# Altium PCB CartReader_1.2_Minimal.PcbDoc
Units mm, origin at the board's own origin, x right, y up, seen from the top; angles counter-clockwise.
Board outline 100 x 50 mm, 2 copper layers (Top Layer, Bottom Layer), stack 1.62 mm thick; 61 components, 75 nets, 314 pads, 273 vias.
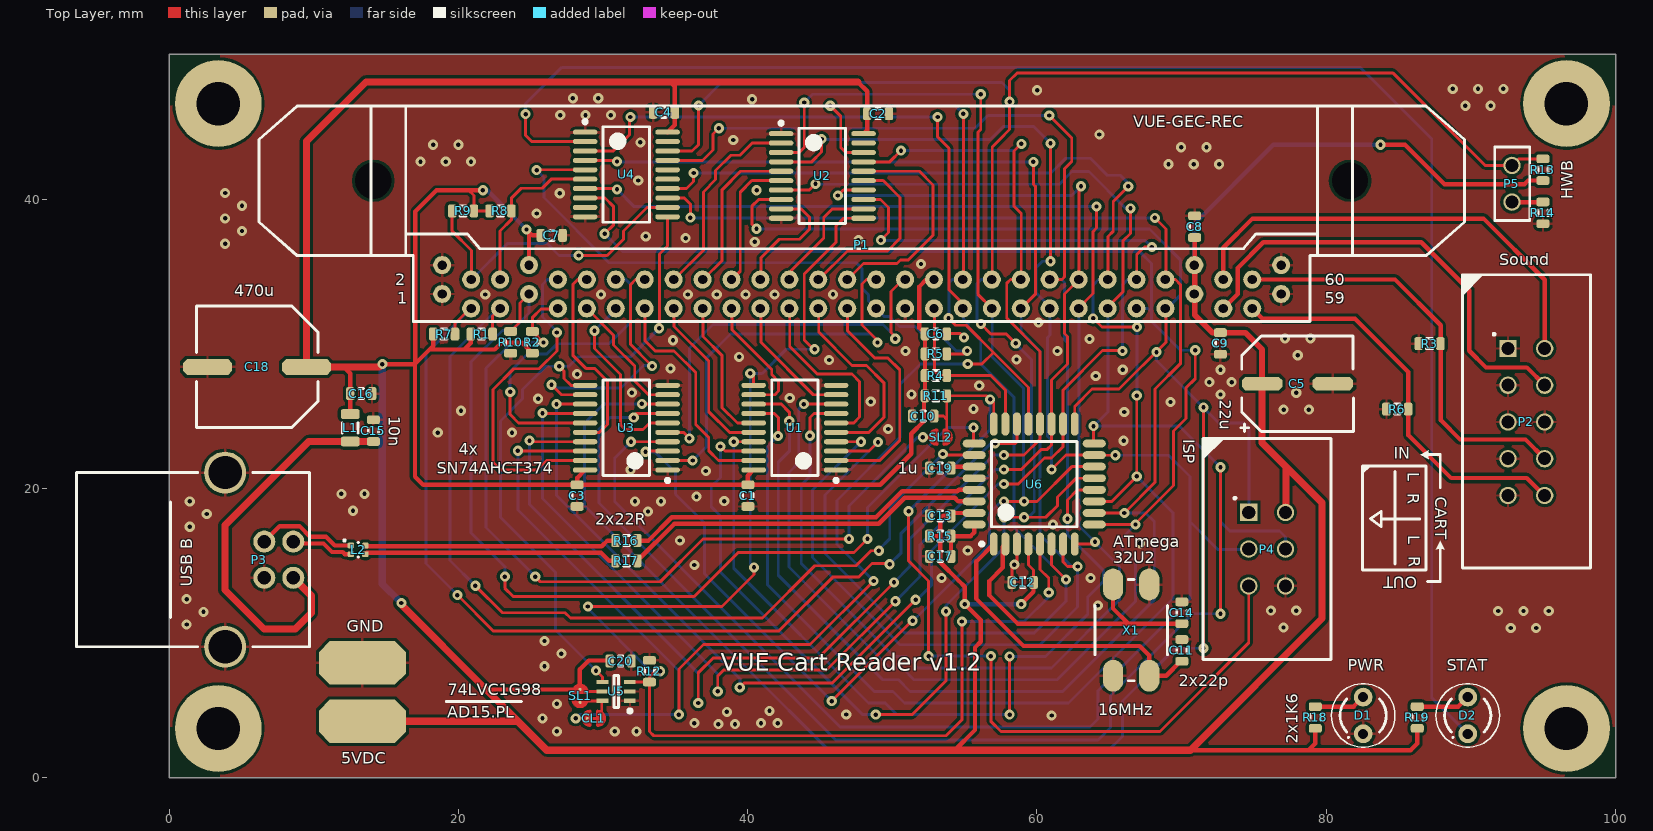
[diagram p0: Top Layer view]
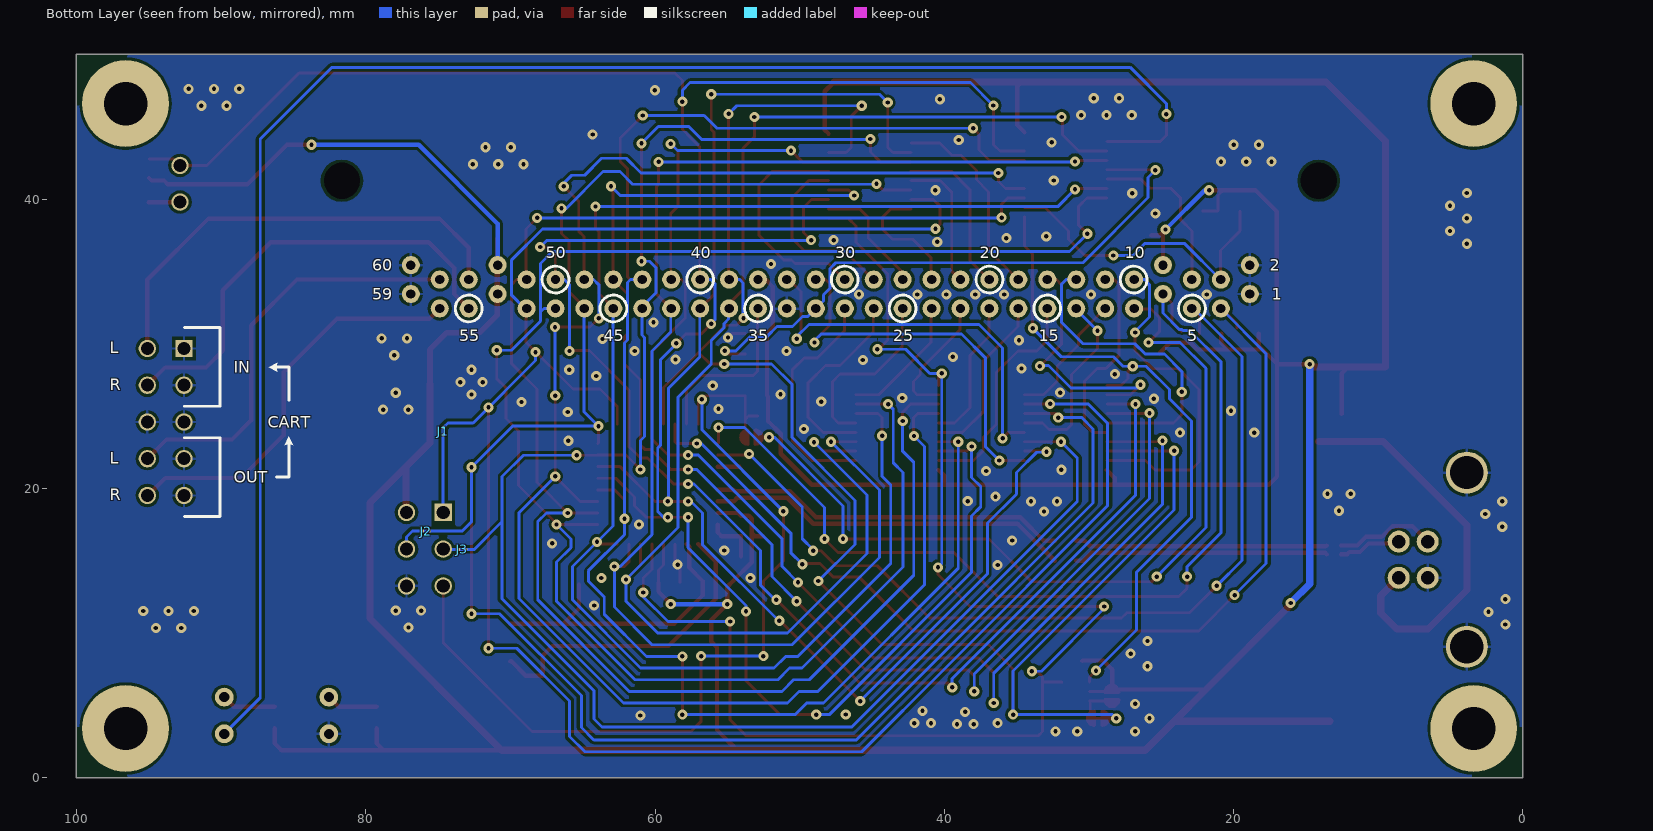
[diagram p1: Bottom Layer view, seen from below]

## Layer stack, top to bottom
Top Solder: solder mask 0.0102, Solder Resist, Dk 3.5
Top Layer: signal copper 0.035
Dielectric1: core 1.55, FR-4, Dk 4.8
Bottom Layer: signal copper 0.035
Bottom Solder: solder mask 0.0102, Solder Resist, Dk 3.5

## Board outline
0,0 0,50 100,50 100,0

## Design rules (kind name [scope] priority, off if disabled: settings)
Clearance PolyClearance [IsRegion] p1: gap=0.2
Clearance DiffClearance [All] p2: gap=0.15
Clearance [All] p3: gap=0.2
ComponentClearance NetTie_Clearance [IsNetTieComponent] p1: gap=0 collisioncheckmode=3 verticalgap=0 showdistances=FALSE
ComponentClearance SpecialClearance [InComponentClass('UnderConnector') vs InComponentClass('Connector')] p2: gap=0 collisioncheckmode=3 verticalgap=0 showdistances=FALSE
ComponentClearance [All] p3: gap=0.2 collisioncheckmode=3 verticalgap=0.2 showdistances=FALSE
DiffPairsRouting [All] p1: maxlimit=0.2 minlimit=0.15 mostfreqgap=0.15 toplayer_minwidth=0.381 toplayer_maxwidth=0.381 toplayer_prefwidth=0.381 bottomlayer_minwidth=0.381 bottomlayer_maxwidth=0.381 bottomlayer_prefwidth=0.381 maxuncoupledlength=10
HoleSize PreferredHoleSize [All] p1: absolutevalues=TRUE maxlimit=5.5 minlimit=0.3 maxpercent=80.000 minpercent=20.000
HoleSize [All] p2: absolutevalues=TRUE maxlimit=5.5 minlimit=0.2 maxpercent=80.000 minpercent=20.000
HoleToHoleClearance HoleToHoleClearance_lt20 [HoleDiameter <= 2.0 vs HoleDiameter <= 2.0] p1: gap=0.4 allowstackedmicrovias=TRUE
HoleToHoleClearance HoleToHoleClearance_gt20 [All vs HoleDiameter > 2.0] p2: gap=0.5 allowstackedmicrovias=TRUE
MatchedLengths [IsDifferentialPair] p1: tolerance=1 checknetsindiffpair=TRUE checkdiffpairvsdiffpair=FALSE checkothers=TRUE
MinimumAnnularRing MinimumAnnularRing_Fix [All] p1: minimumring=0.15
MinimumAnnularRing [All] p2: minimumring=0.2
MinimumSolderMaskSliver [All] p1: minsoldermaskwidth=0.1
PlaneClearance [All] p1: clearance=0.5
PlaneConnect [All] p1: planeconnectstyle=Relief reliefexpansion=0.5 reliefentries=2 reliefconductorwidth=0.2 reliefairgap=0.2
PolygonConnect Power_VIAs [IsVia and InNetClass('PWR') and SolderMaskTentingBottom and SolderMaskTentingTop] p1: connectstyle=Direct reliefconductorwidth=0.254 reliefentries=4 polygonreliefangle="90 Angle" airgapwidth=0.254
PolygonConnect [All] p2: connectstyle=Relief reliefconductorwidth=0.2 reliefentries=4 polygonreliefangle="90 Angle" airgapwidth=0.2
RoutingCorners [All] p1: cornerstyle=45-Degree minsetback=2 maxsetback=2
RoutingVias [All] p1: holewidth=0.3 width=0.7 viastyle="Through Hole" minholewidth=0.2 minwidth=0.6 maxholewidth=5.5 maxwidth=5.9
SilkToSilkClearance [All] p1: silktosilkclearance=0.2
SilkToSolderMaskClearance SilkscreenOverComponentPads [IsPad] p1: minsilkscreentomaskgap=0.2 clearancetoexposedcopper=TRUE
SolderMaskExpansion [All] p1: expansion=0.1
Width Width_PWR [InNetClass('PWR')] p1: maxlimit=0.5 minlimit=0.2 preferedwidth=0.3
Width [All] p2: maxlimit=0.4 minlimit=0.2 preferedwidth=0.2
19 further rules are at their usual default settings.

## Classes and differential pairs
net class PWR: GND NetC17_2 VBUS VCC5
component class VUE_Connector: C1 C2 C3 C4 C5 C6 C7 C8 C9 P1 P2 R1 R2 R3 R4 R5 R6 R7 R8 R9 R10 U1 U2 U3 U4
component class System: C10 C11 C12 C13 C14 C15 C16 C17 C18 C19 C20 CL1 D1 D2 J1 J2 J3 L1 L2 P3 P4 P5 R11 R12 R13 R14 R15 R16 R17 R18 R19 SL1 SL2 U5 U6 X1
component class Connector: P1
component class UnderConnector: C2 C4 C7 C8 C18 P2 R8 R9 U2 U4
differential pair D: +D_P -D_N
differential pair D_IN: +D_IN_P -D_IN_N
differential pair D_IN_CHOKE: +D_IN_CHOKE_P -D_IN_CHOKE_N

## Components (designator, comment, footprint, x,y, rotation, side; value= is the part's Value field where it differs from the comment)
C1 "100n" C0603 40.01,19.5 r90 top
C2 "100n" C0603 49.01,45.9 r180 top
C3 "100n" C0603 28.21,19.5 r90 top
C4 "100n" C0603 34.21,46 r0 top
C5 "22uF" CAPE66X66 78.01,27.24 r90 top
C6 "100n" C0603 53.01,30.68 r180 top
C7 "100n" C0603 26.45,37.49 r180 top
C8 "100n" C0603 70.9,38.09 r270 top
C9 "100n" C0603 72.68,30.02 r90 top
C10 "100n" C0603 52.13,25 r0 top
C11 "22p" C0603 70.01,8.8 r270 top
C12 "100n" C0603 59.01,13.5 r0 top
C13 "100n" C0603 53.31,18.1 r0 top
C14 "22p" C0603 70.01,11.4 r270 top
C15 "10n" C0603 14.12,23.99 r270 top
C16 "100n" C0603 13.28,26.55 r180 top
C17 "100n" C0603 53.31,15.3 r0 top
C18 "470u" C8.3x8.3mm 6.08,28.4 r270 top
C19 "1u" C0603 53.31,21.4 r0 top
C20 "100n" C0603 31.21,8.06 r180 top
CL1 "Cuttable Link" CuttableLink 29.61,4.1 r180 top net-tie
D1 "L-934LG" L-934LX 82.55,4.3 r90 top
D2 "L-934LI" L-934LX 89.78,4.3 r90 top
J1 "0.2mm" NETTIE_02MM 74.65,23.69 r90 bottom net-tie
J2 "0.2mm" NETTIE_02MM 76.07,17.05 r180 bottom net-tie
J3 "0.2mm" NETTIE_02MM 73.57,15.78 r180 bottom net-tie
L1 "BMB2A1000LN2" IND0805 12.52,24.19 r90 top
L2 "DLP11SN900HL2L" 0504 13.07,15.75 r0 top
P1 "GEC_RECEPTABLE" GEC_REC 47.88,36.85 r0 top
P2 "Header 2x5" GARRY_WSL-XG-10 93.83,24.59 r270 top
P3 "USB B Socket" USB_B_SOCKET 1.66,15.07 r270 top
P4 "Header 2x3" GARRY_WSL-XG-6 75.91,15.8 r270 top
P5 "STL1-XXXXVXX-2" GARRY_STL1-XXXXGXX-2 92.84,40.98 r270 top
R1 "open" R0603 21.61,30.67 r180 top
R2 "10k" R0603 25.11,30.1 r270 top
R3 "10k" R0603 87.14,30 r0 top
R4 "open" R0603 53.01,27.8 r180 top
R5 "10k" R0603 53.01,29.3 r180 top
R6 "10k" RESC1608X55 84.91,25.48 r0 top
R7 "10k" R0603 19.01,30.67 r180 top
R8 "open" R0603 22.91,39.18 r180 top
R9 "open" R0603 20.32,39.18 r0 top
R10 "10k" R0603 23.61,30.1 r90 top
R11 "10k" R0603 53.01,26.4 r180 top
R12 "10k" R0603 33.21,7.36 r270 top
R13 "10k" R0603 94.98,42.03 r270 top
R14 "1k6" R0603 94.98,39.05 r90 top
R15 "10k" R0603 53.31,16.7 r180 top
R16 "22R" R0603 31.62,16.39 r180 top
R17 "22R" R0603 31.62,14.99 r180 top
R18 "1k6" R0603 79.24,4.16 r270 top
R19 "1k6" R0603 86.29,4.16 r270 top
SL1 "Solderable Link" SolderableLink#1 28.41,5.4 r90 top
SL2 "Solderable Link" SolderableLink#2 53.08,23.54 r0 top
U1 "SN74AHCT374PW" TSOP65P640X120-20N 43.26,24.2 r180 top
U2 "SN74AHCT374PW" TSOP65P640X120-20N 45.16,41.6 r0 top
U3 "SN74AHCT374PW" TSOP65P640X120-20N 31.61,24.2 r180 top
U4 "SN74AHCT374PW" TSOP65P640X120-20N 31.61,41.7 r0 top
U5 "74LVC1G98DW-7" SOT65P210X110-6N 30.91,5.96 r180 top
U6 "ATmega32U2" TQFP80P900X900X120-32N 59.81,20.3 r90 top
X1 "16 MHz" OSCC700X500X120A 66.51,10.2 r90 top

## Footprints (in the part's own frame and the unit in brackets; to place one, negate y for a bottom-side part, rotate by r counter-clockwise, add the part's x,y. Pads: shape width x height; smd on the part's side, far side on the other; paste and mask are expansions set on the pad)
0504 [mm] "Choke1210x90"
  rrect50% 0.45x0.4 smd: 1(-0.5,0.3) 2(0.5,0.3) 3(0.5,-0.3) 4(-0.5,-0.3)
  silkscreen extent -1,-0.5 0.01,0.7, body extent -0.6,-0.5 0.6,0.5, height 0.9
C8.3x8.3mm [mm] "CAPAE80X80"
  oct 1.1x3.4 smd: 1(0,3.425) 2(0,-3.425)
  silkscreen extent -4.2,-4.2 4.2,4.2, body extent -4.23,-4.23 4.25,4.2, height 10.7
C0603 [mm] "CAPC1608X90 - Original Description: Chip Capacitor; Body 1.0 x 0.5 mm [0603]"
  rrect50% 0.6x0.9 smd: 1(-0.75,0) 2(0.75,0)
  silkscreen extent -0.15,-0.35 0.15,0.35, body extent -0.8,-0.4 0.8,0.4, height 0.9
CAPE66X66 [mm]
  oct 0.95x2.8 smd: 1(0,2.45) 2(0,-2.45)
  silkscreen extent -3.3,-3.86 3.3,3.9, body extent -3.3,-3.86 3.3,3.85, height 5.5
CuttableLink [mm]
  round 0.2 smd paste-0.1: 1(-0.2,0) 2(0.7,0)
  Top Layer region: 0,-0.5 -0.217,-0.45 -0.391,-0.312 -0.487,-0.111 -0.487,0.111 -0.391,0.312 -0.217,0.45 0,0.5 0,0.5
  Top Layer region: 0.5,0.5 0.717,0.45 0.891,0.312 0.987,0.111 0.987,-0.111 0.891,-0.312 0.717,-0.45 0.5,-0.5 0.5,-0.5
  Top Layer lines w0.2: 0.5,0 0,0 ; 0.5,0.5 cw(c0.5,0) 0.5,-0.5 0.5,0.5 ; 0,0.5 ccw(c0,0) 0,-0.5 0,0.5
GARRY_STL1-XXXXGXX-2 [mm]
  round 1.2 hole 0.9: 1(-1.35,0) 2(1.19,0)
  silkscreen extent -2.61,-1.19 2.45,1.23, body extent -2.6,-1.23 2.45,1.23, height 10.2
GARRY_WSL-XG-6 [mm]
  rect 1.2x1.2 hole 0.9: 1(-2.54,-1.27)
  round 1.2 hole 0.9: 2(-2.54,1.27) 3(0,-1.27) 4(0,1.27) 5(2.54,-1.27) 6(2.54,1.27)
  silkscreen extent -7.64,-4.43 7.64,4.43, body extent -7.6,-4.4 7.6,4.4, height 10.2
GARRY_WSL-XG-10 [mm]
  rect 1.2x1.2 hole 0.9: 1(-5.08,-1.27)
  round 1.2 hole 0.9: 2(-5.08,1.27) 3(-2.54,-1.27) 4(-2.54,1.27) 5(0,-1.27) 6(0,1.27) 7(2.54,-1.27) 8(2.54,1.27) 9(5.08,-1.27) 10(5.08,1.27)
  silkscreen extent -10.18,-4.43 10.1,4.43, body extent -10.18,-4.43 10.1,4.43, height 10.2
GEC_REC [mm]
  round 0 hole 2.5 unplated paste+0 mask+0: 0(-33.77,4.413) 0(33.77,4.413)
  round 1.25 hole 0.65: 1(-29,-3.412) 2(-29,-1.412) 3(-27,-4.412) 4(-27,-2.412) 5(-25,-4.412) 6(-25,-2.412) 7(-23,-3.412) 8(-23,-1.412) 9(-21,-4.412) 10(-21,-2.412) 11(-19,-4.412) 12(-19,-2.412) 13(-17,-4.412) 14(-17,-2.412) 15(-15,-4.412) 16(-15,-2.412) 17(-13,-4.412) 18(-13,-2.412) 19(-11,-4.412) 20(-11,-2.412) 21(-9,-4.412) 22(-9,-2.412) 23(-7,-4.412) 24(-7,-2.412) 25(-5,-4.412) 26(-5,-2.412) 27(-3,-4.412) 28(-3,-2.412) 29(-1,-4.412) 30(-1,-2.412) 31(1,-4.412) 32(1,-2.412) 33(3,-4.412) 34(3,-2.412) 35(5,-4.412) 36(5,-2.412) 37(7,-4.412) 38(7,-2.412) 39(9,-4.412) 40(9,-2.412) 41(11,-4.412) 42(11,-2.412) 43(13,-4.412) 44(13,-2.412) 45(15,-4.412) 46(15,-2.412) 47(17,-4.412) 48(17,-2.412) 49(19,-4.412) 50(19,-2.412) 51(21,-4.412) 52(21,-2.412) 53(23,-3.412) 54(23,-1.412) 55(25,-4.412) 56(25,-2.412) 57(27,-4.412) 58(27,-2.412) 59(29,-3.412) 60(29,-1.412)
  silkscreen extent -41.67,-5.31 41.67,9.59
IND0805 [mm] "INDC2012X135 - Original Description: Inductor; Body 2.0 x 1.2 mm [0805]"
  rrect50% 0.7x1.3 smd: 1(-0.95,0) 2(0.95,0)
  silkscreen extent -0.35,-0.55 0.35,0.55, body extent -1,-0.65 1,0.65, height 1.05
L-934LX [mm]
  round 1.3 hole 0.7: 1(-1.27,0) 2(1.27,0)
  silkscreen extent -2.2,-2.2 2.2,2.2
NETTIE_02MM [mm]
  round 0.2 smd paste+0: 1(0,0) 2(0.5,0)
  Top Layer lines w0.2: 0,0 0.5,0
OSCC700X500X120A [mm]
  oval 2.2x1.4 smd: 1(-3.15,-1.25) 2(3.15,-1.25) 3(3.15,1.25) 4(-3.15,1.25)
  silkscreen extent -3.5,-2.5 3.5,2.5, body extent -3.5,-2.5 3.5,2.5, height 1.2
R0603 [mm] "RESC1608X55 - Original Description: Chip Resistor; Body 1.0 x 0.5 mm [0603]"
  rrect50% 0.6x0.9 smd: 1(-0.75,0) 2(0.75,0)
  silkscreen extent -0.2,-0.35 0.2,0.35, body extent -0.8,-0.4 0.8,0.4, height 0.55
RESC1608X55 [mm] "Chip Resistor; Body 1.0 x 0.5 mm [0603]"
  rrect50% 0.6x0.9 smd: 1(-0.75,0) 2(0.75,0)
  silkscreen extent -0.2,-0.35 0.2,0.35, body extent -0.8,-0.4 0.8,0.4, height 0.55
SolderableLink#1 [mm]
  round 0.2 smd paste-0.1: 1(-0.2,0) 2(0.7,0)
  Top Layer region: 0,-0.5 -0.217,-0.45 -0.391,-0.312 -0.487,-0.111 -0.487,0.111 -0.391,0.312 -0.217,0.45 0,0.5 0,0.5
  Top Layer region: 0.5,0.5 0.717,0.45 0.891,0.312 0.987,0.111 0.987,-0.111 0.891,-0.312 0.717,-0.45 0.5,-0.5 0.5,-0.5
  Top Layer lines w0.2: 0,0.5 ccw(c0,0) -0.09,-0.492 ccw(c0,0) 0,-0.5 0,0 0,0.5 ; 0.5,0.5 cw(c0.5,0) 0.7,0.458 cw(c0.5,0) 1,0.01 cw(c0.5,0) 1,0 cw(c0.5,0) 0.56,-0.496 cw(c0.5,0) 0.5,-0.5 0.5,0 0.5,0.5
SolderableLink#2 [mm]
  round 0.2 smd paste-0.1: 1(-0.2,0) 2(0.7,0)
  Top Layer region: 0.5,0.5 0.717,0.45 0.891,0.312 0.987,0.111 0.987,-0.111 0.891,-0.312 0.717,-0.45 0.5,-0.5 0.5,-0.5
  Top Layer region: 0,-0.5 -0.217,-0.45 -0.391,-0.312 -0.487,-0.111 -0.487,0.111 -0.391,0.312 -0.217,0.45 0,0.5 0,0.5
  Top Layer lines w0.2: -0.5,-0.01 cw(c0,0) 0,0.5 0,0 0,-0.5 cw(c0,0) -0.5,-0.01 ; 0.5,-0.5 ccw(c0.5,0) 0.7,0.458 ccw(c0.5,0) 0.5,0.5 0.5,-0.5
SOT65P210X110-6N [mm] "SOT363, 6-Leads, Body 2.2x2.2mm (max), Pitch 0.65mm, IPC Medium Density"
  rect 0.8x0.3 smd: 1(-0.95,0.65) 2(-0.95,0) 3(-0.95,-0.65) 4(0.95,-0.65) 5(0.95,0) 6(0.95,0.65)
  silkscreen extent -1.08,-1.1 0.15,1.47, body extent -0.67,-1.1 0.67,1.1, height 1.1
TQFP80P900X900X120-32N [mm] "TQFP, 32-Leads, Body 9.0x9.0mm (max), Pitch 0.80mm, IPC Medium Density"
  oval 1.6x0.55 smd: 1(-4.15,2.8) 2(-4.15,2) 3(-4.15,1.2) 4(-4.15,0.4) 5(-4.15,-0.4) 6(-4.15,-1.2) 7(-4.15,-2) 8(-4.15,-2.8) 17(4.15,-2.8) 18(4.15,-2) 19(4.15,-1.2) 20(4.15,-0.4) 21(4.15,0.4) 22(4.15,1.2) 23(4.15,2) 24(4.15,2.8)
  oval 0.55x1.6 smd: 9(-2.8,-4.15) 10(-2,-4.15) 11(-1.2,-4.15) 12(-0.4,-4.15) 13(0.4,-4.15) 14(1.2,-4.15) 15(2,-4.15) 16(2.8,-4.15) 25(2.8,4.15) 26(2,4.15) 27(1.2,4.15) 28(0.4,4.15) 29(-0.4,4.15) 30(-1.2,4.15) 31(-2,4.15) 32(-2.8,4.15)
  silkscreen extent -4.27,-2.95 2.95,3.75, body extent -3.5,-3.5 3.5,3.5, height 1.2
TSOP65P640X120-20N [mm] "TSOP, 20-Leads, Body 6.6x4.5mm (max), Pitch 0.65mm, IPC Medium Density"
  oval 1.7x0.35 smd: 1(-2.85,2.925) 2(-2.85,2.275) 3(-2.85,1.625) 4(-2.85,0.975) 5(-2.85,0.325) 6(-2.85,-0.325) 7(-2.85,-0.975) 8(-2.85,-1.625) 9(-2.85,-2.275) 10(-2.85,-2.925) 11(2.85,-2.925) 12(2.85,-2.275) 13(2.85,-1.625) 14(2.85,-0.975) 15(2.85,-0.325) 16(2.85,0.325) 17(2.85,0.975) 18(2.85,1.625) 19(2.85,2.275) 20(2.85,2.925)
  silkscreen extent -2.98,-3.3 1.6,3.77, body extent -2.25,-3.3 2.25,3.3, height 1.2
USB_B_SOCKET [mm]
  round 2.9 hole 2.3: 0(-6.02,2.213) 0(6.02,2.213)
  round 1.52 hole 0.92: 1(1.25,6.923) 2(-1.25,6.923) 3(-1.25,4.922) 4(1.25,4.922)
  silkscreen extent -6.02,-8.07 6.02,8.03

## Part data
C1 C2 C3 C4 C6 C7 C8 C9 C10 C12 C13 C16 C17 C20: library part 1168, "Ceramic Chip Capacitor"
C5: library part 1001
C11 C14: library part 1146, "Ceramic Chip Capacitor"
C15: library part 1162, "Ceramic Chip Capacitor"
C18: library part 1210, "Aluminum Electrolytic Capacitors"
C19: library part 1070, "Ceramic Chip Capacitor"
CL1: library part CuttableLink
D1: library part 3000, "Green Low-Current LED"
D2: library part 3002, "Red Low-Current LED"
J1 J2 J3: library part 6000
L1: library part 3003, "Chip Ferrit Bead Impedanz 1k"
L2: library part 3030, "SMD Common Mode Choke Coil"
P1: "VUE GEC_RECEPTABLE"
P2: library part 2008, "Shrouded Header 2x5"
P3: library part 2000
P4: library part 2005, "AVR In-System-Program Header 2x3"
P5: library part 9605, "Header"
R1 R2 R3 R4 R5 R6 R7 R8 R9 R10 R11 R12 R13 R15: library part 2471, "Resistor"
R14 R18 R19: library part 2452, "Resistor"
R16 R17: library part 2407, "Resistor"
SL1 SL2: library part SolderableLink
U1 U2 U3 U4: library part 4003, "8x D Flip Flop w/ OE_N"
U5: library part 4004, "Configurable Multi-Function Logic Gate"
U6: library part 4001, "8-Bit AVR MCU,32KB Flash,USB Contr.,TQFP-32"
X1: library part 8000

## Free pads (board coordinates)
  round 6 hole 3: 0(3.4,3.4) 0(3.4,46.6) 0(96.6,3.4) 0(96.6,46.6)
  oct 6x3 smd mask-0.1: 0(13.36,3.9) 0(13.36,7.94)

## Via types
v1: diameter 0.7, hole 0.3, Top Layer to Bottom Layer, tented both sides, 273 vias

## Nets (pads, with @x,y where several pads share a name; then routed paths per layer and width w, separated by ;. In a path a pad name is that pad's centre, name@x,y a point inside that pad or via, vN(x,y) a via of type N, cw(c..) or ccw(c..) an arc to the next point about the centre after c; other vN are vias at no path point)
\ES: P1.4 R9.1 U4.12 | length 21.9
  Top Layer w0.2: R9.1 19.57,37.78 20.91,36.44 P1.4@20.91,34.435 ; v1(28.31,36.1) 30.285,36.1 31.404,37.219 31.404,37.794 33.035,39.425 U4.12
  Bottom Layer w0.2: P1.4@20.91,34.435 23.415,36.94 26.12,36.94 26.96,36.1 v1(28.31,36.1)
\INTCRO: P1.9 R2.1 SL2.1 | length 57.9
  Top Layer w0.2: v1(25.31,13.9) 25.663,13.547 33.957,13.547 36.91,16.5 v1@47,16.5 ; v1(25.88,30.09) 25.11,30.86 25.11,31.8 25.71,32.4 P1.9@26.88,32.4 ; v1(52.11,23.53) 52.58,23.53 52.87,23.53 SL2.1
  Bottom Layer w0.2: v1(25.31,13.9) 21.91,17.3 21.91,28.3 23.7,30.09 v1@26.01,30.09 ; v1(47,16.51) 47,18.79 51.74,23.53 v1(52.11,23.53)
\LWR: P1.3 R7.1 U6.22 | length 71.1
  Top Layer w0.2: R7.1@19.76,31.1 19.76,31.39 P1.3@20.91,32.54 ; v1(19.93,12.62) 22.4,10.15 42.17,10.15 45.88,13.86 47.66,13.86 48.6,14.8 49.76,14.8 v1(49.81,14.75) ; v1(57.11,23.1) 58.51,23.1 58.61,23.2 U6.22
  Bottom Layer w0.2: v1(19.93,12.62) 17.75,14.8 17.75,29.307 P1.3 ; v1@49.86,14.8 50.61,15.55 50.61,16.9 56.81,23.1 v1(57.11,23.1)
\OE: P1.35 R4.1 U6.23 | length 12.1
  Top Layer w0.2: P1.35@52.91,32.438 52.91,28.1 53.21,27.8 R4.1 56.81,27.8 57.81,26.8 U6.23
\PL: U3.11 U4.11 U5.4 | length 45.5
  Top Layer w0.2: v1(26.97,28.44) 27.31,28.1 27.31,27.6 27.785,27.125 U3.11 ; v1(29.51,7.4) 29.96,6.95 U5.4 ; v1(33.88,31.07) 33.91,31.1 33.91,36.2 34.46,36.75 U4.11
  Bottom Layer w0.2: v1(29.51,7.4) 26.71,10.2 26.71,14.2 22.91,18 22.91,24.66 24.44,26.19 24.44,26.83 26.05,28.44 v1(26.97,28.44) 27.65,28.44 28.31,29.1 31.91,29.1 v1(33.88,31.07)
\RAM_CS: P1.6 R8.1 U4.6 | length 11.6
  Top Layer w0.2: P1.6 P1.6@22.88,34.465 ; P1.6@22.91,34.435 P1.6@22.88,34.465 ; U4.6 26.415,41.375 25.79,40.75 24.35,40.75 23.66,40.06 R8.1 23.66,38.57 22.88,37.79 P1.6@22.88,34.465
\RESET: C10.2 P4.5 R11.1 SL2.2 U6.24 | length 62.1
  Top Layer w0.2: v1(51.13,18.42) 51.13,14.98 52.51,13.6 v1(52.51,8.4) ; C10.2 53.53,25 53.76,24.77 ; SL2.2 53.78,23.998 53.76,24.018 53.76,24.77 ; 56.51,26.4 R11.1 53.76,24.77 ; v1(56.81,8.4) 56.81,3.9 57.51,3.2 68.51,3.2 74.64,9.33 P4.5 ; U6.24 57.01,25.9
  Bottom Layer w0.2: v1(51.13,18.42) 56.76,24.05 v1(56.76,26.15) ; v1(52.51,8.4) v1(56.81,8.4)
\ROM_CE: P1.31 R5.1 U4.5 | length 41.8
  Top Layer w0.2: v1(25.41,42) 25.435,42.025 U4.5 ; R5.1 54.96,29.3 v1(55.17,29.51) v1@55.17,29.355
  Bottom Layer w0.2: v1(25.41,42) 25.91,41.5 25.91,40.1 30.41,35.6 47.51,35.6 47.91,35.2 47.91,33.83 48.36,33.38 48.36,32.958 49.438,31.88 49.81,31.88 50.5,31.19 51.57,31.19 52.28,30.48 53.43,30.48 54.4,29.51 v1(55.17,29.51)
\RST: P1.7 R10.2 U6.25 | length 66.3
  Top Layer w0.2: v1(23.21,13.9) 23.21,13.1 23.79,12.52 36.3,12.52 39.35,15.57 47.34,15.57 v1(48.28,16.51) ; R10.2 24.26,31.5 24.26,32.817 P1.7 ; v1(55.61,24.2) 55.61,23.15 U6.25
  Bottom Layer w0.2: v1(23.21,13.9) 23.21,14.6 20.86,16.95 20.86,28.73 23.04,30.91 23.51,30.91 23.57,30.97 23.73,30.97 24.88,32.12 P1.7 ; v1(48.28,16.51) 48.28,18.67 53.81,24.2 v1(55.61,24.2)
\UWR: P1.5 R1.1 U6.26 | length 64.9
  Top Layer w0.2: v1(21.17,13.27) 23.04,11.4 27.37,11.4 27.74,11.03 41.02,11.03 44.64,14.65 47.49,14.65 48.53,15.69 v1(49.07,15.69) ; R1.1 22.36,31.917 P1.5 ; v1(53.49,22.38) 53.57,22.3 U6.26
  Bottom Layer w0.2: v1(21.17,13.27) 19.42,15.02 19.42,29.11 22.748,32.438 P1.5 ; v1(49.07,15.69) 49.07,15.77 49.82,16.52 49.82,18.71 v1(53.49,22.38)
A0: P1.29 U1.2 | length 16.1
  Top Layer w0.2: U1.2 49.135,21.925 50.51,23.3 50.51,28.2 49.71,29 48.81,29 46.91,30.9 P1.29@46.91,32.438
A1: P1.27 U1.5 | length 13.7
  Top Layer w0.2: P1.27@44.91,32.438 44.91,30.8 47.21,28.5 48.21,28.5 49.41,27.3 49.41,24.9 48.385,23.875 U1.5
A2: P1.25 U1.6 | length 12.7
  Top Layer w0.2: P1.25@42.91,32.438 42.91,29.8 44.81,27.9 47.21,27.9 47.735,27.375 47.735,24.925 47.335,24.525 U1.6
A3: P1.23 U1.9 | length 9
  Top Layer w0.2: P1.23@40.91,32.438 40.91,30.1 44.535,26.475 U1.9
A4: P1.21 U1.12 | length 8.9
  Top Layer w0.2: P1.21@38.91,32.438 38.91,30.96 41.66,28.21 41.66,27.87 42.14,27.39 42.14,26.73 41.885,26.475 U1.12
A5: P1.19 U1.15 | length 10
  Top Layer w0.2: P1.19@36.91,32.438 36.91,30.5 38.21,29.2 38.21,25.6 39.285,24.525 U1.15
A6: P1.17 U1.16 | length 11.8
  Top Layer w0.2: P1.17@34.91,32.438 34.91,31.2 37.31,28.8 37.31,25.3 38.735,23.875 U1.16
A7: P1.15 U1.19 | length 15.8
  Top Layer w0.2: P1.15@32.91,32.438 32.91,30.2 33.61,29.5 34.91,29.5 36.41,28 36.41,24.419 37.31,23.519 37.31,22.6 37.985,21.925 U1.19
A8: P1.18 U2.2 | length 14
  Top Layer w0.2: P1.18@34.91,34.435 36.935,36.46 36.935,40.5 37.779,41.344 37.779,41.969 38.841,43.031 39.466,43.031 40.31,43.875 U2.2
A9: P1.20 U2.5 | length 11.4
  Top Layer w0.2: P1.20@36.91,34.435 36.92,34.435 38.235,35.75 38.235,40.65 39.51,41.925 U2.5
A10: P1.22 U2.6 | length 9.4
  Top Layer w0.2: P1.22@38.91,34.435 39.485,35.01 39.485,40.475 40.285,41.275 U2.6
A11: P1.24 U2.9 | length 8.7
  Top Layer w0.2: P1.24@40.91,34.435 40.91,35.95 42.185,37.225 43.585,37.225 44.285,37.925 44.285,38.725 43.685,39.325 U2.9
A12: P1.26 U2.12 | length 8.3
  Top Layer w0.2: P1.26@42.91,34.435 42.91,34.95 45.26,37.3 45.26,38.725 45.86,39.325 U2.12
A13: P1.28 U2.15 | length 12.6
  Top Layer w0.2: P1.28@44.91,34.435 46.895,36.42 49.67,36.42 50.54,37.29 50.54,40.1 49.365,41.275 U2.15
A14: P1.30 U2.16 | length 15.9
  Top Layer w0.2: P1.30@46.91,34.435 48.015,35.54 50.32,35.54 50.56,35.78 51.1,35.78 52.82,37.5 52.82,40.98 51.875,41.925 U2.16
A15: P1.32 U3.2 | length 27.7
  Top Layer w0.2: U3.2 v1(36.195,21.925) ; P1.32@48.91,34.435 48.215,34.435 47.9,34.12 47.9,31.29 48.97,30.22 v1(48.97,30.08)
  Bottom Layer w0.2: v1(36.195,21.925) 37.14,22.87 37.14,29 38.82,30.68 48.51,30.68 48.97,30.22 v1(48.97,30.08)
A16: P1.34 U3.5 | length 28.1
  Top Layer w0.2: U3.5 35.555,23.875 v1(35.97,23.46) ; v1(50.2,30.34) 50.2,30.49 49.91,30.78 49.91,33.6 50.745,34.435 P1.34@50.91,34.435
  Bottom Layer w0.2: v1(35.97,23.46) 35.97,29.71 37.598,31.338 49.352,31.338 50.2,30.49 v1(50.2,30.34)
A17: P1.13 U3.6 | length 13
  Top Layer w0.2: v1(29.41,30.9) 29.41,29.666 31.2,27.876 31.2,24.4 31.53,24.07 32.76,24.07 33.215,24.525 U3.6
  Bottom Layer w0.2: v1(29.41,30.9) P1.13@30.914,32.404
A18: P1.11 U3.9 | length 9
  Top Layer w0.2: P1.11 30.73,30.588 30.73,29.92 32.19,28.46 32.19,27.43 33.145,26.475 U3.9
A19: P1.16 U3.12 | length 17.6
  Top Layer w0.2: v1(26.44,27.16) 27.125,26.475 U3.12 ; P1.16@32.91,34.435 32.245,34.435 31.91,34.1 31.91,29.95 v1@33.256,28.604 ; v1(33.39,28.45) v1@33.39,28.49
  Bottom Layer w0.2: v1(26.44,27.16) 26.66,26.94 31.24,26.94 32.79,28.49 33.39,28.49 v1(33.39,28.45)
A20: P1.14 U3.15 | length 21.9
  Top Layer w0.2: v1(23.58,26.669) 23.58,25.1 24.155,24.525 U3.15
  Bottom Layer w0.2: v1(23.58,26.669) 23.58,28.08 24.78,29.28 26.11,29.28 26.83,30 30.41,30 31.91,31.5 31.91,34.1 31.575,34.435 P1.14@30.91,34.435
A21: P1.12 U3.16 | length 13.9
  Top Layer w0.2: U3.16 29.765,23.875 30.31,24.42 30.31,27.4 29.41,28.3 28.81,28.3 27.91,29.2 27.91,34.1 28.245,34.435 P1.12@28.91,34.435
A22: P1.10 U3.19 | length 23.7
  Top Layer w0.2: v1(26.81,30.78) 26.81,29.5 25.58,28.27 23.83,28.27 22.39,26.83 22.39,21.83 22.95,21.27 25.43,21.27 26.08,21.92 28.755,21.92 U3.19
  Bottom Layer w0.2: v1(26.81,30.78) 26.81,30.85 25.81,31.85 25.81,34.1 26.145,34.435 P1.10@26.91,34.435
AD0: P1.37 U1.3 U4.3 U6.6 | length 97.7
  Top Layer w0.2: U4.3 30.71,43.325 31.835,44.45 v1@31.835,45.725 ; U1.3 48.385,22.575 v1(49.01,23.2) ; v1(53.135,45.675) 53.135,44.285 53.91,43.51 53.91,33.73 P1.37@54.692,32.948 ; U6.6 61.01,14.7 v1(62.01,13.7)
  Bottom Layer w0.2: v1(31.885,45.675) v1(53.135,45.675) ; v1(49.01,23.2) 45.35,19.54 45.35,15.494 50.844,10 ; 50.844,9.994 59.81,9.994 62.01,12.194 v1(62.01,13.7) 58.41,17.3 58.41,26.3 56.11,28.6 56.11,30.231 55.22,31.121 55.22,31.39 54.91,31.7 P1.37@54.91,32.438
AD1: P1.41 U1.4 U4.4 U6.7 | length 99.4
  Top Layer w0.2: U4.4 v1@30.885,42.675 ; U1.4 v1(47.835,23.225) ; P1.41@58.91,32.45 59.91,33.45 59.91,40.85 59.75,41.01 v1(59.75,42.57) ; U6.7 61.81,14.9 62.11,14.6 v1(62.81,14.6)
  Bottom Layer w0.2: v1@30.985,42.575 59.745,42.575 v1(59.75,42.57) ; v1(47.835,23.225) 44.49,19.88 44.49,15.22 50.521,9.189 60.204,9.189 62.81,11.797 v1(62.81,14.6) 62.41,14.6 60.21,16.8 60.21,29.5 58.91,30.8 P1.41@58.91,32.438
  other v1: 30.96,42.6
AD2: P1.45 U1.7 U4.7 U6.8 | length 105.4
  Top Layer w0.2: U4.7 30.91,40.725 v1(30.96,40.675) ; v1(44.3,23.64) 44.3,24.89 44.585,25.175 U1.7 ; U6.8 63.86,16.15 v1(64.01,16.3) ; P1.45@62.864,32.454 63.875,33.465 63.875,37.745 64.12,37.99 v1(64.12,39.49)
  Bottom Layer w0.2: v1(30.96,40.675) 32.16,39.475 64.105,39.475 v1(64.12,39.49) ; v1(44.3,23.64) 44.3,20.84 43.7,20.24 43.7,14.81 50.127,8.383 50.959,8.383 51.765,7.577 60.993,7.577 65.71,12.294 65.71,14.6 v1(64.01,16.3) 62.91,17.4 P1.45@62.91,32.438
AD3: P1.49 U1.8 U4.8 U6.9 | length 118
  Top Layer w0.2: U4.8 30.135,40.075 30.735,39.475 30.735,38.225 v1(30.11,37.6) ; v1(43.885,25.825) U1.8 ; U6.9 v1@66.75,17.5 ; v1@66.78,17.53 69.44,20.19 69.44,23.96 70.31,24.83 70.31,26.95 70.94,27.58 v1(70.94,29.55)
  Bottom Layer w0.2: v1(30.11,37.6) 31.335,36.375 67.084,36.375 67.169,36.29 67.91,35.55 67.91,31.56 69.92,29.55 v1(70.94,29.55) ; v1(43.885,25.825) 43.527,25.467 43.527,21.777 42.85,21.1 42.85,14.56 49.833,7.577 50.692,7.577 51.498,6.772 61.387,6.772 66.81,12.194 66.81,14.9 65.81,15.9 65.81,16.5 v1(66.81,17.5) ; P1.49 67.672,32.438 67.91,32.2
AD4: P1.52 U1.13 U4.13 U6.10 | length 114
  Top Layer w0.2: U4.13 35.61,40.075 36.035,39.65 v1(36.035,38.715) v1@36.035,38.7 ; U1.13 42.318,25.825 42.877,25.267 v1(42.877,24.66) ; U6.10 v1(66.04,18.3) 68.16,20.42 68.16,26.86 69.91,28.61 69.91,34.1 69.575,34.435 68.91,34.435 68.91,37.94 v1(68.15,38.7)
  Bottom Layer w0.2: v1@36.03,38.72 v1(36.035,38.715) ; v1@36.035,38.7 v1(68.15,38.7) ; v1(42.877,24.66) 42.877,22.567 42.11,21.8 42.11,14 49.338,6.772 50.425,6.772 51.231,5.966 61.782,5.966 68.11,12.294 68.11,17.7 67.51,18.3 v1(66.04,18.3)
AD5: P1.48 U1.14 U4.14 U6.11 | length 119.4
  Top Layer w0.2: U4.14 35.76,40.725 36.26,41.225 v1(36.26,41.8) ; U1.14 41.835,25.175 42.122,24.888 42.122,23.652 v1(42.09,23.62) ; v1(63.885,31.75) 64.485,31.15 v1(66.91,31.15) ; U6.11 65.17,19.1 v1(66.9,20.83) v1(66.9,26.41) ; P1.48@64.91,34.435 64.91,37.42 65.27,37.78 65.27,39.84 v1(66.31,40.88)
  Bottom Layer w0.2: v1(36.26,41.8) 60.97,41.8 61.99,42.82 63.69,42.82 64.86,41.65 65.75,41.65 66.31,41.09 v1(66.31,40.88) ; v1(42.09,23.62) 41.37,22.9 41.37,13.34 48.744,5.966 50.044,5.966 50.85,5.16 62.176,5.16 69.41,12.394 69.41,18.32 v1(66.9,20.83) ; v1(63.885,31.75) 63.885,34.075 64.245,34.435 P1.48@64.91,34.435 ; v1(66.9,26.41) 66.91,26.42 v1(66.91,31.15)
AD6: P1.44 U1.17 U4.17 U6.12 | length 114.5
  Top Layer w0.2: U4.17 36.885,42.675 37.61,43.4 37.61,44.5 v1(38.01,44.9) ; v1(39.035,23.225) U1.17 ; v1(58.11,4.355) v1(58.11,8.383) ; v1(60.85,45.78) 62.4,44.23 62.4,42.59 61.91,42.1 61.91,34.625 61.72,34.435 P1.44@60.91,34.435 ; v1(62.11,17.9) 62.11,19.2 62.81,19.9 U6.12
  Bottom Layer w0.2: v1(38.01,44.9) 55.72,44.9 56.6,45.78 v1(60.85,45.78) ; v1(39.035,23.225) 39.035,14.475 48.35,5.16 49.51,5.16 50.316,4.355 v1(58.11,4.355) ; v1(58.11,8.383) 60.599,8.383 63.51,11.294 63.51,12.5 64.61,13.6 64.61,14.3 62.11,16.8 v1(62.11,17.9) 62.11,30.05 61.91,30.25 61.91,34.225 61.7,34.435 P1.44@60.91,34.435
AD7: P1.40 P5.1 R13.1 U1.18 U4.18 U6.13 | length 155.7
  Top Layer w0.2: U4.18 36.16,43.325 36.61,43.775 v1(36.61,46.475) ; v1(38.11,22.9) 38.435,22.575 U1.18 ; v1(48.855,4.355) 51.365,4.355 53.71,6.7 v1(53.71,11.5) ; v1@55.87,31.39 v1@55.89,31.37 ; v1(56.12,31.37) 56.81,30.68 57.88,30.68 v1(58.535,30.025) ; P1.40@56.91,34.435 56.91,43.6 57.41,44.1 58.11,44.8 v1(58.11,46.74) 58.11,48.19 58.65,48.73 84.59,48.73 90.99,42.33 P5.1 93.29,42.78 R13.1 ; v1(57.71,18) v1(59.11,18) 60.61,18 61.41,18.8 61.41,19.4 62.71,20.7 U6.13
  Bottom Layer w0.2: v1(36.61,46.475) 38.185,48.05 57.58,48.05 58.11,47.52 v1(58.11,46.74) ; v1(38.11,22.9) 38.11,20.76 37.48,20.13 37.48,18.73 38.11,18.1 38.11,14.2 47.955,4.355 v1(48.855,4.355) ; v1(53.71,11.5) 53.71,11.9 57.71,15.9 v1(57.71,18) ; v1@55.89,31.37 v1(56.12,31.37) 55.86,31.63 55.86,34.15 56.145,34.435 P1.40@56.91,34.435 ; v1(58.535,30.025) 58.535,29.977 59.61,28.902 59.61,23 59.81,22.8 59.81,18.4 59.41,18 v1(59.11,18)
AD8: P1.39 U2.3 U3.3 U6.14 | length 97.4
  Top Layer w0.2: v1(32.94,22.53) 32.985,22.575 U3.3 ; U2.3 43.56,43.225 43.91,43.575 v1(43.91,46.675) ; v1@45.805,5.295 v1@51.38,10.87 ; v1(56.11,47.25) 56.11,44.8 55.91,44.6 55.91,33.425 56.897,32.438 P1.39@56.91,32.438 ; v1(57.71,19.1) v1(59.11,19.1) 60.01,19.1 62.41,21.5 U6.14
  Bottom Layer w0.2: v1@32.94,22.5 33.61,22.5 35.01,21.1 35.01,19.6 37.01,17.6 37.01,14.1 45.81,5.3 v1(45.81,5.29) ; v1(43.91,46.675) 44.485,47.25 v1(56.11,47.25) ; v1@51.43,10.82 56.71,16.1 56.71,18.3 57.51,19.1 v1(57.71,19.1) ; P1.39@56.91,32.438 56.91,29.075 59.06,26.925 v1@59.06,19.1
  other v1: 51.4,10.85
AD9: J3.2 P1.43 U2.4 U3.4 U6.15 | length 125
  Top Layer w0.2: v1(31.93,23.225) U3.4 ; U2.4 44.435,42.575 45.11,43.25 v1(45.11,44.15) ; v1(60.935,35.7) v1(60.935,43.855) ; v1(61.01,21.3) 62.01,22.3 U6.15 63.97,22.29 v1(65.42,22.29)
  Bottom Layer w0.2: v1(31.93,23.225) 30.81,22.105 30.81,19.1 40.716,9.194 ; 40.711,9.189 46.4,3.5 63.661,3.5 64.216,4.055 64.216,6.006 70.58,12.37 70.58,17.7 ; v1@45.11,44.125 56.77,44.125 57.665,45.02 59.77,45.02 v1(60.935,43.855) ; P1.43 60.88,32.58 59.94,33.52 59.94,35.255 60.385,35.7 v1(60.935,35.7) ; P1.43@60.91,32.438 60.91,30.6 60.727,30.417 60.727,23.582 61.01,23.3 v1(61.01,21.3) ; v1(65.42,22.29) 69.1,22.29 70.58,20.81 70.58,17.7 ; J3.2 72.5,15.78 70.58,17.7
AD10: J2.2 P1.47 U2.7 U3.7 U6.16 | length 134.7
  Top Layer w0.2: v1(32.12,24.89) 32.12,25.02 32.275,25.175 U3.7 ; U2.7 44.26,40.625 v1(44.685,41.05) ; v1(63.91,24.3) 63.91,23.15 U6.16 ; P1.47@64.91,32.55 65.935,33.575 65.935,37.105 66.46,37.63 v1(66.46,39.36) ; v1(72.69,11.329) v1(72.69,21.46)
  Bottom Layer w0.2: v1(32.12,24.89) 30.5,24.89 29.71,24.1 29.71,18.994 40.321,8.383 ; 40.317,8.383 46.09,2.61 64.23,2.61 65.09,3.47 65.09,5.674 70.745,11.329 v1(72.69,11.329) ; v1@44.685,41.025 61.55,41.025 62.425,41.9 63.59,41.9 v1@66.13,39.36 ; P1.47@64.91,32.438 64.91,25.3 v1(63.91,24.3) 69.85,24.3 v1(72.69,21.46) 72.69,17.69 73.33,17.05 J2.2
AD11: J1.2 P1.51 U2.8 U3.8 U6.17 | length 141.5
  Top Layer w0.2: v1(32.68,25.84) 34.445,25.84 U3.8 ; v1(40.61,37.95) 40.285,38.275 40.285,39.5 40.76,39.975 U2.8 ; U6.17 62.61,25.67 63.81,26.87 65.68,26.87 68.91,30.1 P1.51@68.91,32.438 ; v1(71.51,8.949) v1(71.51,25.6)
  Bottom Layer w0.2: v1(32.68,25.84) 30.05,25.84 28.71,24.5 28.71,18.794 39.927,7.577 ; 39.923,7.577 45.71,1.79 64.85,1.79 65.91,2.85 65.91,5.3 69.559,8.949 v1(71.51,8.949) ; v1@40.61,37.925 67.785,37.925 69.91,35.8 69.91,33.35 69.049,32.489 P1.51@68.829,32.489 ; v1(68.26,29.42) 68.26,28.83 72.57,24.52 74.32,24.52 J1.2
AD12: P1.50 U2.13 U3.13 U6.18 | length 98.7
  Top Layer w0.2: v1(26.785,25.825) U3.13 ; v1@39.46,6.24 39.76,6.54 45.85,6.54 v1(51.61,12.3) ; U2.13 49.185,39.975 49.735,39.425 49.735,37.685 v1(49.21,37.16) ; v1(57.71,20.3) 58.71,20.3 60.51,22.1 61.01,22.1 61.81,22.9 U6.18 61.81,26.8 64.535,29.525 65.885,29.525 v1(65.91,29.5) ; P1.50@66.9,34.445 66.9,36.16 67.43,36.69 v1(67.94,36.69)
  Bottom Layer w0.2: v1(26.785,25.825) 26.785,19.519 39.46,6.844 39.46,6.25 v1(39.45,6.24) ; v1@49.21,37.125 67.505,37.125 v1(67.94,36.69) ; v1(51.61,12.3) 51.71,12.3 52.71,13.3 52.71,15.7 57.31,20.3 v1(57.71,20.3) ; v1(65.91,29.5) 65.91,34.075 66.27,34.435 P1.50@66.91,34.435
AD13: P1.46 U2.14 U3.14 U6.19 | length 97.2
  Top Layer w0.2: v1(25.81,25.2) 25.835,25.175 U3.14 ; v1(37.928,5.966) 37.928,7.028 38.34,7.44 45.45,7.44 v1(50.21,12.2) ; v1(46.235,40.25) 46.61,40.625 U2.14 ; v1(57.71,21.3) 58.91,21.3 60.31,22.7 60.71,22.7 61.01,23 U6.19 61.01,27.5 62.11,28.6 62.11,30.5 61.91,30.7 61.91,33.435 62.91,34.435 62.91,40.76 v1(63.04,40.89)
  Bottom Layer w0.2: v1(25.81,25.2) 25.81,19.294 37.928,7.176 v1(37.928,5.966) ; v1(46.235,40.25) 62.4,40.25 v1(63.04,40.89) ; v1(50.21,12.2) 51.91,13.9 51.91,16.1 57.11,21.3 v1(57.71,21.3)
AD14: P1.42 U2.17 U3.17 U6.20 | length 94.5
  Top Layer w0.2: v1(24.91,23.3) 24.985,23.225 U3.17 ; v1(36.585,5.16) 36.585,7.251 37.594,8.26 44.87,8.26 v1(50.11,13.5) ; U2.17@47.95,42.575 49.825,42.575 v1(50.6,43.35) ; v1(57.71,22.3) 59.11,22.3 60.21,23.4 U6.20 60.21,29.47 57.91,31.77 57.91,34.175 58.17,34.435 58.91,34.435 58.91,39 58.41,39.5 58.41,43.32 v1@58.915,43.825 ; v1(58.92,43.82) v1@58.92,43.83
  Bottom Layer w0.2: v1(24.91,23.3) 24.91,18.9 36.585,7.225 v1(36.585,5.16) ; v1(50.11,13.5) 51.21,14.6 51.21,16.5 57.01,22.3 v1(57.71,22.3) ; v1@50.66,43.35 58.44,43.35 58.92,43.83 v1(58.92,43.82)
AD15: CL1.2 P1.38 U2.18 U3.18 U6.21 | length 117.9
  Top Layer w0.2: v1(24.11,22.6) 24.135,22.575 U3.18 ; v1(28.11,4.1) CL1.2 ; v1(35.242,4.355) 35.242,7.508 36.934,9.2 44.31,9.2 v1(48.71,13.6) ; v1(45.71,46.45) 46.435,45.725 46.435,43.575 46.785,43.225 U2.18 ; v1(53.88,31.77) 54.37,31.28 55.105,31.28 56.985,29.4 ; v1@54.053,31.943 v1@54.067,31.943 ; P1.38@54.91,34.435 v1(54.91,45.89) ; v1(55.21,28.6) 56.185,28.6 56.985,29.4 ; U6.21 59.41,26.975 56.985,29.4
  Bottom Layer w0.2: v1(24.11,22.6) 24.11,18.5 35.242,7.368 v1(35.242,4.355) 28.365,4.355 v1(28.11,4.1) ; v1(45.71,46.45) 54.35,46.45 v1(54.91,45.89) ; v1(48.71,13.6) 46.18,16.13 46.18,19.17 50.54,23.53 50.54,27.2 51.94,28.6 v1(55.21,28.6) ; v1(53.88,31.77) 53.91,31.8 53.91,34.2 54.145,34.435 P1.38@54.91,34.435
D_IN_CHOKE_N: L2.3 R17.2 | length 17.6
  Top Layer w0.3: L2.3 13.67,15.55 29.86,15.55 30.42,14.99 R17.2
D_IN_CHOKE_P: L2.2 R16.2 | length 17.5
  Top Layer w0.3: L2.2 13.62,16 29.91,16 30.3,16.39 R16.2
D_IN_N: L2.4 P3.2 | length 4.3
  Top Layer w0.3: P3.2 8.709,16.194 10.67,16.194 11.264,15.6 12,15.6 12.15,15.45 L2.4
D_IN_P: L2.1 P3.3 | length 7
  Top Layer w0.3: P3.3 7.653,17.39 9.012,17.39 9.749,16.653 10.847,16.653 11.45,16.05 L2.1
D_N: R17.1 U6.30 | length 25.2
  Top Layer w0.3: R17.1 34.93,17.55 49.06,17.55 50.86,19.35 54.31,19.35 54.56,19.1 U6.30
D_P: R16.1 U6.29 | length 24.7
  Top Layer w0.3: R16.1 33.134,16.39 34.744,18 48.874,18 50.674,19.8 54.496,19.8 54.596,19.9 U6.29
GND: C1.1 C2.1 C3.1 C4.1 C5.2 C6.1 C7.1 C8.1 C9.1 C10.1 C11.1 C12.1 C13.1 C14.1 C15.1 C16.1 C17.1 C18.2 C19.1 C20.1 D1.1 P1.1 P1.2 P1.33 P1.59 P1.60 P2.1 P2.3 P2.5 P2.6 P2.7 P2.9 P3.0 P3.4 P4.6 pad.0@13.36,7.94 R3.1 R6.1 R10.1 R12.1 R14.1 U1.1 U1.10 U2.1 U2.10 U3.1 U3.10 U4.1 U4.10 U5.1 U5.2 U6.3 U6.28 X1.2 X1.4 | length 3.9
  Top Layer w0.2: C6.1@53.76,30.7 54.72,30.7 54.95,30.47 v1(54.95,30.43) ; C12.1 v1@58.26,14.55 ; v1(58.435,14.725) 58.61,14.9 U6.3
  other v1: 26.81,3.2 30.81,3.2 32.31,3.2 37.97,3.7 39.12,3.7 36.31,3.77 40.92,3.77 42.07,3.77 25.81,4.1 61.01,4.3 46.81,4.37 38.56,4.55 41.51,4.62 26.81,5.1 25.95,7.7 27.12,8.575 25.95,9.45 92.755,10.35 94.505,10.35 77.045,10.38 1.21,10.59 2.38,11.465 91.88,11.52 93.63,11.52 95.38,11.52 76.17,11.55 77.92,11.55 64.21,11.9 1.21,12.34 53.41,13.8 63.71,13.8 36.31,14.7 55.21,15.7 67.11,16.2 35.31,16.4 1.43,17.35 61.11,17.5 2.6,18.225 33.11,18.4 12.707,18.45 1.43,19.1 32.21,19.1 34.01,19.1 38.38,19.12 36.46,19.43 11.91,19.62 13.505,19.62 37.11,21.2 31.91,21.29 65.99,23.29 18.57,23.85 23.71,23.85 49.71,24.1 66.03,25.28 20.18,25.37 77.05,25.44 78.8,25.44 55.61,25.5 69.23,25.97 48.51,26 25.51,26.2 42.91,26.25 72.69,26.49 51.33,26.5 31.99,26.62 77.925,26.61 56.01,27.1 71.92,27.345 73.46,27.345 64.06,27.77 28.21,27.9 65.93,28.2 72.69,28.2 34.66,28.29 45.63,28.87 58.58,28.91 39.41,29.09 78.025,29.2 50.91,29.5 61.41,29.5 34.84,30.24 63.63,30.33 77.15,30.37 78.9,30.37 60.1,31.48 21.86,33.403 29.86,33.403 35.86,33.403 37.86,33.403 39.86,33.403 41.86,33.403 45.9,33.41 51.98,35.51 3.87,36.915 40.49,37.04 47.65,37.16 35.71,37.3 32.95,37.42 5.04,37.79 3.87,38.665 25.41,39 5.04,39.54 27.01,40.4 3.87,40.415 40.62,40.61 32.43,41.29 69.09,42.41 70.84,42.41 72.59,42.41 17.375,42.59 19.125,42.59 20.875,42.59 69.965,43.58 71.715,43.58 18.25,43.76 20,43.76 32.58,43.92 39,44.09 64.31,44.47 27.04,45.8 28.79,45.8 30.54,45.8 89.615,46.45 91.365,46.45 40.31,46.9 27.915,46.97 29.665,46.97 60.01,47.52 88.74,47.62 90.49,47.62 92.24,47.62
LSND_IN: P1.56 P2.2 | length 31.8
  Top Layer w0.3: P1.56 72.88,36.63 74.9,38.65 90.87,38.65 95.1,34.42 P2.2
LSND_OUT: P1.58 P2.8 R3.2 | length 29.2
  Top Layer w0.3: P1.58 84.752,34.438 87.91,31.28 87.91,24.72 89.25,23.38 93.77,23.38 P2.8
MISO: J1.1 P4.1 | length 5.4
  Bottom Layer w0.2: P4.1 74.65,18.35 J1.1
MOSI: J2.1 P4.4 | length 2.1
  Bottom Layer w0.2: J2.1 76.76,17.05 77.18,16.63 P4.4
NetC17_2: C17.2 R15.1 U6.32 | length 3.7
  Top Layer w0.3: C17.2 R15.1 55.41,16.7 55.66,16.95 U6.32
NetC19_2: C19.2 U6.27 | length 1.6
  Top Layer w0.2: C19.2 C19.2@54.16,21.5
  Top Layer w0.3: C19.2@54.16,21.5 U6.27
NetCL1_1: CL1.1 SL1.1 U5.6 | length 3.2
  Top Layer w0.2: 28.12,5.302 28.501,5.302 ; SL1.1 28.52,5.31 28.902,5.31 U5.6 29.91,5.26 29.91,4.1
NetD1_2: D1.2 R18.1 | length 3.6
  Top Layer w0.3: R18.1 81.89,4.91 D1.2
NetD2_2: D2.2 R19.1 | length 3.8
  Top Layer w0.3: R19.1 89.12,4.91 D2.2
NetP5_2: P5.2 R14.2 | length 2.2
  Top Layer w0.3: P5.2 R14.2@95.02,39.79
PL: R12.2 U1.11 U2.11 U5.3 U6.5 | length 97
  Top Layer w0.2: v1(28.95,11.83) 38.22,11.83 40.44,14.05 v1(40.44,14.54) ; U5.3 31.87,6.6 R12.2@33.21,6.6 ; v1(33.95,7.36) 33.6,7.36 33.21,6.97 R12.2 R12.2@33.21,6.6 ; v1(40.18,27.95) 40.41,27.72 U1.11 ; v1(44.63,29.62) 44.55,29.62 43.91,30.26 43.91,34.81 46.11,37.01 46.11,38.14 46.645,38.675 U2.11 ; v1(54.81,10.8) 54.81,4 53.71,2.9 33.51,2.9 33.21,3.2 R12.2@33.21,6.6 ; U6.5 60.21,14.4 60.81,13.8 v1(60.81,12.8)
  Bottom Layer w0.2: v1(28.95,11.83) 28.95,11.69 33.28,7.36 v1(33.95,7.36) ; v1(40.44,14.54) 40.18,14.8 v1(40.18,27.95) 41,27.95 42.67,29.62 v1(44.63,29.62) ; v1@44.59,29.58 v1@44.62,29.55 ; v1(54.81,10.8) 55.71,10.8 59.11,10.8 60.81,12.5 v1(60.81,12.8)
RSND_IN: P1.55 P2.4 | length 31.7
  Top Layer w0.3: P1.55 73.88,33.437 73.88,35.24 75.65,37.01 86.57,37.01 89.89,33.69 89.89,29.51 91.04,28.36 93.87,28.36 P2.4
RSND_OUT: P1.57 P2.10 R6.2 | length 28.1
  Top Layer w0.3: P1.57 75.588,31.73 81.99,31.73 85.67,28.05 85.67,23.68 88.63,20.72 93.86,20.72 95.07,19.51 P2.10
SCK: J3.1 P4.3 | length 1.1
  Bottom Layer w0.2: J3.1 73.81,15.78 P4.3@74.65,15.78
STATUS: D2.1 U4.2 | length 114.4
  Top Layer w0.2: v1(24.65,45.87) 24.65,44.39 25.065,43.975 U4.2
  Bottom Layer w0.2: v1(24.65,45.87) 24.65,46.61 27.15,49.11 82.33,49.11 87.29,44.15 87.29,5.52 D2.1
VBUS: C15.2 L1.1 P3.1 | length 27.6
  Top Layer w0.5: P3.1 9.822,12.58 9.822,11.377 8.722,10.277 6.552,10.277 3.862,12.967 3.862,17.447 9.655,23.24 L1.1 C15.2
VCC5: C1.2 C2.2 C3.2 C4.2 C5.1 C6.2 C7.2 C8.2 C9.2 C12.2 C13.2 C16.2 C18.1 C20.2 L1.2 P1.8 P1.36 P1.53 P1.54 P4.2 pad.0@13.36,3.9 R1.2 R2.2 R4.2 R5.2 R7.2 R8.2 R9.2 R11.2 R13.2 R15.2 R18.2 R19.2 SL1.2 U1.20 U2.20 U3.20 U4.20 U5.5 U6.4 U6.31 | length 395.2
  Top Layer w0.2: 20.7,40.61 21.07,40.24 R9.2 R8.2 ; 28.906,5.96 U5.5 ; U6.4 59.41,14.7 59.76,14.35 C12.2
  Top Layer w0.3: 12.08,28.4 12.53,27.95 C16.2 12.52,26.54 L1.2 ; v1(14.74,28.59) 17,28.59 ; 17.02,28.61 17.02,39.14 18.49,40.61 20.7,40.61 v1(21.69,40.61) ; R7.2@18.26,30.7 R7.2 18.26,29.85 18.01,29.6 ; R1.2@20.86,30.7 20.86,30.05 20.41,29.6 ; 21.91,6.1 27.952,6.1 SL1.2 ; v1(24.71,37.9) v1@24.88,37.73 ; P1.8 v1@24.88,37.73 ; R2.2 24.4,30.06 22.97,30.06 22.51,29.6 20.41,29.6 ; C7.2 25.12,37.49 v1@24.88,37.73 ; 28.61,6.1 SL1.2 ; U3.20 28.21,20.725 C3.2 ; C20.2 30.42,8.1 29.01,8.1 28.4,7.49 28.4,6.4 28.4,6.11 SL1.2 ; U4.20 34.96,45.125 C4.2 34.96,47.8 34.66,48.1 ; U1.20 40.01,20.875 C1.2 ; 47.61,48.1 48.26,47.45 C2.2 48.26,44.775 U2.20 ; R15.2 53.11,16.7 53.31,16.9 ; P1.36@52.91,34.435 52.345,34.435 51.87,33.96 51.87,31.09 52.26,30.7 R5.2 R4.2 R11.2 52.19,26.33 52.19,24.65 51.31,23.77 51.31,22.4 49.16,20.25 C1.2 ; 54.31,1.9 55.71,3.3 55.71,9 56.11,9.4 56.11,10.9 v1(55.01,12) 55.01,13.2 54.61,13.6 54.603,13.6 53.31,14.893 53.31,16.9 ; U6.31 54.26,18.3 C13.2 53.51,18.1 53.31,17.9 53.31,16.9 ; v1(58.91,12) 59.76,12.85 C12.2 ; 70.61,1.9 78.78,1.9 ; P1.54 70.91,35.467 C8.2@70.91,37.29 ; R18.2 79.24,2.36 78.78,1.9 ; v1(83.75,43.76) 85.44,43.76 88.17,41.03 93.7,41.03 93.95,41.28 94.8,41.28 R13.2@94.98,41.46 ; R19.2 86.29,2.36 85.83,1.9 78.78,1.9 ; 17,28.59 17,20.81 17.56,20.25 C3.2 ; 17,28.59 18.01,29.6 ; 18.01,29.6 20.41,29.6 ; C3.2 C1.2
  Top Layer w0.4: P1.54@70.91,35.438 70.91,31.99 72.14,30.76 74.41,30.76 75.56,29.61 C5.1
  Top Layer w0.5: pad.0@13.36,3.9 24.11,3.9 ; v1(14.74,28.59) 14.55,28.4 12.08,28.4 C18.1 9.505,43.995 13.61,48.1 34.66,48.1 47.61,48.1 ; v1(16.06,12.07) 16.06,11.95 21.91,6.1 24.11,3.9 ; C5.1 75.56,23.15 77.21,21.5 ; P4.2 77.21,18.37 77.21,21.5 ; 24.11,3.9 26.11,1.9 54.31,1.9 70.61,1.9 79.71,11 79.71,19 77.21,21.5
  Bottom Layer w0.3: v1(21.69,40.61) 22,40.61 v1(24.71,37.9) ; v1(55.01,12) v1(58.91,12) ; P1.54 70.88,38.3 76.34,43.76 v1(83.75,43.76)
  Bottom Layer w0.5: v1(14.74,28.59) 14.74,13.39 v1(16.06,12.07)
XIN: C11.2 U6.1 X1.1 | length 21.9
  Top Layer w0.3: U6.1 55.81,14.95 55.81,12.36 59.07,9.1 67.11,9.1 67.76,8.45 X1.1 68.93,7.05 69.93,8.05 C11.2
XOUT: C14.2 U6.2 X1.3 | length 21.2
  Top Layer w0.3: U6.2 57.635,15.975 57.635,14.525 56.71,13.6 56.71,12.6 58.66,10.65 66.31,10.65 ; X1.3 65.26,11.7 66.31,10.65 ; C14.2 66.31,10.65
pads on no net: P1.0 U2.19 U4.9 U4.15 U4.16 U4.19

## Polygon pours and split planes (outlines as drawn)
GND on Top Layer "TopGND" (solid, remove dead copper, pour order 3): 0,50 100,50 100,0 0,0
GND on Bottom Layer "BtmGND" (solid, remove dead copper, pour order 7): 0,50 100,50 100,0 0,0

## Silkscreen, mask and mechanical layers (free items; w line width, h text height)
Top Overlay:
  region: 83.08,21.54 82.5,20.96 82.5,21.54
  region: 87.09,22.03 86.48,22.34 87.09,22.65 87,22.35
  region: 87.58,15.76 87.87,16.37 88.18,15.76 87.88,15.85
  lines w0.2: 19.16,5.27 24.36,5.27 ; 83.81,17.88 84.33,17.88 86.46,17.88 ; 84.74,14.78 84.74,21.17 ; 87,13.56 87.88,13.56 87.88,15.85 ; 87,22.35 87.88,22.35 87.88,20.06 ; 82.5,14.36 82.5,21.54 86.9,21.54 86.9,14.36 82.5,14.36 ; 83.06,17.91 83.8,17.35 83.8,18.42 83.06,17.91
  text "VUE-GEC-REC" at 66.64,44.96 h0.8
  text "HWB" at 97.04,39.994 h0.8 r90
  text "Sound" at 91.964,35.42 h0.8
  text "2" at 15.637,34.035 h0.8
  text "60" at 79.89,34.035 h0.8
  text "470u" at 4.514,33.28 h0.8
  text "1" at 15.77,32.765 h0.8
  text "59" at 79.89,32.765 h0.8
  text "22u" at 72.64,26.12 h0.8 r270
  text "10n" at 15.2,24.98 h0.8 r270
  text "ISP" at 70.11,23.39 h0.8 r270
  text "4x" at 20.01,22.32 h0.8
  text "IN" at 84.67,22.04 h0.8
  text "L" at 85.64,21.12 h0.8 r270
  text "SN74AHCT374" at 18.52,21 h0.8
  text "1u" at 50.378,21 h0.8
  text "R" at 85.64,19.667 h0.8 r270
  text "CART" at 87.52,19.416 h0.8 r270
  text "2x22R" at 29.47,17.47 h0.8
  text "L" at 85.67,16.763 h0.8 r270
  text "ATmega" at 65.26,15.93 h0.8
  text "R" at 85.69,15.31 h0.8 r270
  text "32U2" at 65.26,14.82 h0.8
  text "OUT" at 86.3,13.88 h0.8 r180
  text "USB B" at 1.59,13.204 h0.8 r90
  text "GND" at 12.294,10.08 h0.8
  text "PWR" at 81.484,7.4 h0.8
  text "STAT" at 88.314,7.4 h0.8
  text "VUE Cart Reader v1.2" at 38.145,7.392 h1.2
  text "2x22p" at 69.8,6.31 h0.8
  text "74LVC1G98" at 19.27,5.71 h0.8
  text "16MHz" at 64.22,4.3 h0.8
  text "AD15.PL" at 19.22,4.14 h0.8
  text "2x1K6" at 78.02,2.361 h0.8 r90
  text "5VDC" at 11.894,0.97 h0.8
Bottom Overlay:
  circle w0.2: c22.88,32.438 r0.928
  circle w0.2: c26.91,34.435 r0.928
  circle w0.2: c32.88,32.438 r0.928
  circle w0.2: c36.88,34.438 r0.928
  circle w0.2: c42.88,32.438 r0.928
  circle w0.2: c46.88,34.438 r0.928
  circle w0.2: c56.88,34.438 r0.928
  circle w0.2: c62.88,32.438 r0.928
  circle w0.2: c66.88,34.438 r0.928
  circle w0.2: c72.88,32.438 r0.928
  circle w0.2: c52.88,32.438 r0.928
  region: 86.1,28.06 86.71,28.37 86.1,28.68 86.19,28.38
  region: 85.6,22.98 85.31,23.59 85,22.98 85.3,23.07
  lines w0.2: 85.3,23.07 85.3,20.78 86.18,20.78 ; 85.31,26.09 85.31,28.38 86.19,28.38 ; 92.54,18.06 90.08,18.06 90.08,23.5 92.54,23.5 ; 92.54,25.68 90.08,25.68 90.08,31.12 92.54,31.12
  text "10" at 27.51,35.92 h0.8
  text "20" at 37.546,35.92 h0.8
  text "30" at 47.546,35.92 h0.8
  text "40" at 57.546,35.92 h0.8
  text "50" at 67.546,35.92 h0.8
  text "2" at 17.51,35.038 h0.8
  text "60" at 79.54,35.038 h0.8
  text "1" at 17.377,33.038 h0.8
  text "59" at 79.54,33.038 h0.8
  text "5" at 23.2,30.16 h0.8
  text "15" at 33.48,30.16 h0.8
  text "25" at 43.546,30.16 h0.8
  text "35" at 53.546,30.16 h0.8
  text "45" at 63.546,30.16 h0.8
  text "55" at 73.546,30.16 h0.8
  text "L" at 97.68,29.337 h0.8
  text "IN" at 89.12,28 h0.8
  text "R" at 97.68,26.797 h0.8
  text "CART" at 86.79,24.19 h0.8
  text "L" at 97.68,21.717 h0.8
  text "OUT" at 89.12,20.38 h0.8
  text "R" at 97.68,19.177 h0.8
Top Solder:
  lines w0.4: 29.11,4.12 29.7,4.12 ; 29.7,4.1 29.7,4.11
Mechanical 2:
  lines w0.45: 8.582,13.82 8.584,13.82 ; 12.57,16.05 12.571,16.05 ; 14.12,24.74 14.121,24.74 ; 18.88,33.438 18.881,33.438 ; 19.57,39.18 19.571,39.18 ; 19.76,30.67 19.761,30.67 ; 23.61,29.35 23.611,29.35 ; 23.66,39.18 23.661,39.18 ; 25.11,30.85 25.111,30.85 ; 28.21,18.75 28.211,18.75 ; 28.41,5.2 28.411,5.2 ; 28.76,44.625 28.761,44.625 ; 29.81,4.1 29.811,4.1 ; 31.86,5.31 31.861,5.31 ; 32.37,14.99 32.371,14.99 ; 32.37,16.39 32.371,16.39 ; 33.21,8.11 33.211,8.11 ; 33.46,46 33.461,46 ; 34.46,21.275 34.461,21.275 ; 40.01,18.75 40.011,18.75 ; 42.31,44.525 42.311,44.525 ; 46.11,21.275 46.111,21.275 ; 49.76,45.9 49.761,45.9 ; 51.38,25 51.381,25 ; 52.56,15.3 52.561,15.3 ; 52.56,18.1 52.561,18.1 ; 52.56,21.4 52.561,21.4 ; 52.88,23.54 52.881,23.54 ; 53.76,26.4 53.761,26.4 ; 53.76,27.8 53.761,27.8 ; 53.76,29.3 53.761,29.3 ; 53.76,30.68 53.761,30.68 ; 54.06,16.7 54.061,16.7 ; 57.01,16.15 57.011,16.15 ; 58.26,13.5 58.261,13.5 ; 70.01,9.55 70.011,9.55 ; 70.01,12.15 70.011,12.15 ; 70.9,38.84 70.901,38.84 ; 74.64,18.34 74.641,18.34 ; 75.56,27.24 75.561,27.24 ; 79.24,4.91 79.241,4.91 ; 82.55,3.03 82.551,3.03 ; 84.16,25.48 84.161,25.48 ; 86.29,4.91 86.291,4.91 ; 86.39,30 86.391,30 ; 89.78,3.03 89.781,3.03 ; 92.56,29.67 92.561,29.67 ; 9.505,28.4 9.506,28.4 ; 12.52,23.24 12.521,23.24 ; 14.03,26.55 14.031,26.55 ; 22.36,30.67 22.361,30.67 ; 27.2,37.49 27.201,37.49 ; 31.96,8.06 31.961,8.06 ; 67.76,7.05 67.761,7.05 ; 72.68,29.27 72.681,29.27 ; 92.84,42.33 92.841,42.33 ; 94.98,38.3 94.981,38.3 ; 94.98,42.78 94.981,42.78
  text "C4" at 33.614,45.634 h1.14
  text "C2" at 48.422,45.533 h1.14
  text "R13" at 95.387,41.062 h1.28 r90
  text "U4" at 29.042,40.275 h5
  text "U2" at 42.606,40.148 h5
  text "P5" at 94.117,39.056 h4.09 r90
  text "R9" at 19.746,38.827 h1.14
  text "R8" at 22.311,38.827 h1.14
  text "R14" at 95.387,38.091 h1.28 r90
  text "P1" at 45.73,37.379 h5
  text "C7" at 25.842,37.125 h1.14
  text "C8" at 71.536,37.024 h2 r90
  text "R7" at 18.425,30.318 h1.14
  text "C6" at 52.41,30.318 h1.14
  text "R1" at 21.092,30.293 h1.14
  text "R3" at 86.548,29.632 h1.14
  text "R10" at 24.013,29.124 h1.28 r90
  text "R2" at 25.765,29.074 h2 r90
  text "C9" at 73.314,28.972 h2 r90
  text "R5" at 52.41,28.947 h1.14
  text "R4" at 52.435,27.423 h1.14
  text "C18" at 2.169,26.838 h4.91
  text "C16" at 12.278,26.153 h1.28
  text "R11" at 52.105,25.975 h1.28
  text "C5" at 75.346,25.645 h5
  text "R6" at 84.312,25.111 h1.14
  text "C10" at 51.14,24.603 h1.28
  text "L1" at 13.319,23.257 h2.44 r90
  text "SL2" at 52.588,23.232 h1
  text "C15" at 14.539,23.003 h1.28 r90
  text "U3" at 29.042,22.47 h5
  text "U1" at 40.98,22.47 h5
  text "P2" at 95.438,22.19 h5 r90
  text "C19" at 52.308,20.996 h1.28
  text "U6" at 57.236,18.71 h5
  text "C1" at 40.65,18.558 h2 r90
  text "C3" at 28.839,18.431 h2 r90
  text "C13" at 52.308,17.694 h1.28
  text "R15" at 52.334,16.297 h1.28
  text "R16" at 30.642,15.993 h1.28
  text "L2" at 12.532,15.383 h1.18
  text "C17" at 52.308,14.9 h1.28
  text "R17" at 30.642,14.57 h1.28
  text "P3" at -0.803,13.478 h5
  text "P4" at 77.531,13.351 h5 r90
  text "C12" at 58.023,13.097 h1.28
  text "C14" at 70.419,10.405 h1.28 r90
  text "X1" at 68.133,7.89 h5 r90
  text "C11" at 70.419,7.89 h1.28 r90
  text "C20" at 30.21,7.661 h1.28
  text "R12" at 33.614,6.391 h1.28 r90
  text "U5" at 29.652,5.096 h2.44
  text "SL1" at 28.737,4.969 h1 r90
  text "CL1" at 28.636,3.775 h1
  text "D1" at 81.036,3.242 h3.3
  text "D2" at 88.097,3.242 h3.3
  text "R18" at 79.639,3.191 h1.28 r90
  text "R19" at 86.7,3.191 h1.28 r90
Mechanical 3:
  lines w0.049: 73.57,15.78 73.571,15.78 ; 74.65,23.69 74.651,23.69 ; 76.07,17.05 76.071,17.05
  text "J1" at 74.33,23.562 h1 r270
  text "J2" at 76.261,16.729 h1
  text "J3" at 73.771,15.459 h1
Mechanical 14:
  the board outline again, w0.2
Drill Drawing:
  text ".LEGEND" at 110,0.19 h1.2

## Dimensions
0,50 to 0,0 on Mechanical 14
0,0 to 100,0 on Mechanical 14